# EAGLE board AiOT_Firefighter (EAGLE 9.7.0)

Size 233.03 x 199.93 mm. Coordinates in mm from the lower left corner, seen from the top.
Outline: 0,0 233.03,0 233.03,199.93 0,199.93 0,0
Copper layers (1*16): Top 0.035mm / dielectric 1.5mm / Bottom 0.035mm
Design rules "default": minimum track width 6mil, minimum drill 0.35mm, track to track 6mil, track to pad 6mil, pad to pad 6mil, via to via 6mil, smd to smd 6mil, copper to edge 40mil, drill to drill 6mil, minimum pad ring 10mil, minimum via ring 8mil, stop-mask expansion 4mil, vias tented up to drill 0mil, thermal gap 10mil

## Footprints (pad centres in the part's own frame; a part is rotated, then mirrored left to right if it is on the bottom)
BATTERY-GENERIC = drill 1.118 pad 3.15 octagon: + 2.54,0; - -2.54,0
LEDRD254W60D565H860B = drill 0.981 pad 1.581: 1 -1.27,0; 2 1.27,0
LEDRD254W60D565H860B_B = drill 0.981 pad 1.581: 1 -1.27,0; 2 1.27,0
1X06 = drill 1.016 long: 1 -6.35,0; 2 -3.81,0; 3 -1.27,0; 4 1.27,0; 5 3.81,0; 6 6.35,0
PIEZO = drill 1 pad 1.6: 1 -3.5,0; 2 3.5,0
RESAD1016W63L850D250B = drill 0.83 pad 1.43: 1 -5.08,0; 2 5.08,0
ARDUINO-UNO-R3-SHIELD = drill 1.016 pad 1.88: 3.3V 24.13,-2.54; 5V 24.13,0; A0 24.13,12.7; A1 24.13,15.24; A2 24.13,17.78; A3 24.13,20.32; A4 24.13,22.86; A5 24.13,25.4; AREF -24.13,-13.97; D2 -24.13,20.32; D3 -24.13,17.78; D4 -24.13,15.24; D5 -24.13,12.7; D6 -24.13,10.16; D7 -24.13,7.62; D8 -24.13,3.81; D9 -24.13,1.27; D10 -24.13,-1.27; D11 -24.13,-3.81; D12 -24.13,-6.35; D13 -24.13,-8.89; GND@0 24.13,2.54; GND@1 24.13,5.08; GND@2 -24.13,-11.43; IOREF 24.13,-7.62; NC 24.13,-10.16; RES 24.13,-5.08; RX -24.13,25.4; SCL -24.13,-19.05; SDA -24.13,-16.51; TX -24.13,22.86; VIN 24.13,7.62
TSOP48 = drill 0.8: 1 -2.54,0; 2 0,0; 3 2.54,0
LCD-I2C = drill 1.016 long: 1 -19.05,-5.08; 2 -19.05,-7.62; 3 -19.05,-10.16; 4 -19.05,-12.7
DIP762W53P254L1969H508Q16B = drill 0.743 pad 1.343: 1 -3.81,8.89; 2 -3.81,6.35; 3 -3.81,3.81; 4 -3.81,1.27; 5 -3.81,-1.27; 6 -3.81,-3.81; 7 -3.81,-6.35; 8 -3.81,-8.89; 9 3.81,-8.89; 10 3.81,-6.35; 11 3.81,-3.81; 12 3.81,-1.27; 13 3.81,1.27; 14 3.81,3.81; 15 3.81,6.35; 16 3.81,8.89
TO220V = drill 1.016 long: 1 -2.54,-2.54; 2 0,-2.54; 3 2.54,-2.54
TO92 = drill 0.813 octagon: 1 -1.27,0; 2 0,1.905; 3 1.27,0

## Placement (x,y rotation side)
BAT1  9V  [BATTERY-GENERIC]  8.26,74.58 180 top
DHIGH  RED  [LEDRD254W60D565H860B]  164.39,61.31 180 top
DLOW  BLUE  [LEDRD254W60D565H860B_B]  164.19,70.5 180 top
MHARWAREHACKING  PINHD-1X06_1X06M  [1X06]  135.36,11.09 180 top
PIEZOQUICKLY_A  PIEZO  [PIEZO]  185.2,100.86 270 top
R1  220k  [RESAD1016W63L850D250B]  49.76,63.35 90 top
R2  220k  [RESAD1016W63L850D250B]  49.76,68.43 90 top
RHIGH_FREQUENCY  1000k  [RESAD1016W63L850D250B]  139.84,131.7 90 top
RPULL-UP  10000k  [RESAD1016W63L850D250B]  150,131.7 90 top
RPULL-UP1  10000k  [RESAD1016W63L850D250B]  152.54,131.7 90 top
U1  ARDUINO-UNO-R3-SHIELD  [ARDUINO-UNO-R3-SHIELD]  131.97,102.49 270 top
U2  IR-RECEIVERTSOP48  [TSOP48]  226.67,118.73 270 top
U3  LCD-16X2-I2CSUNFOUNDER-IIC  [LCD-I2C]  114.04,187.61 0 top
U4  IR-RECEIVERTSOP48  [TSOP48]  226.68,102.97 270 top
U5  IR-RECEIVERTSOP48  [TSOP48]  225.99,85.3 270 top
U6  IR-RECEIVERTSOP48  [TSOP48]  147.44,193.28 0 top
U7  IR-RECEIVERTSOP48  [TSOP48]  128.32,193.37 0 top
U8  IR-RECEIVERTSOP48  [TSOP48]  107.74,193.58 0 top
U9  L293E  [DIP762W53P254L1969H508Q16B]  104.44,7.66 90 top
U10  LM7805_TO220V  [TO220V]  8.6,86.43 0 top
U13  TMP36GT9Z_TO92  [TO92]  112.33,63.99 0 top
U14  TMP36GT9Z_TO92  [TO92]  101.85,64.14 0 top
UTEMPERATURE_SENSOR  TMP36GT9Z_TO92  [TO92]  122.74,64 0 top

## Library data of the parts
BAT1 MHARWAREHACKING PIEZOQUICKLY_A R1 R2 RHIGH_FREQUENCY RPULL-UP RPULL-UP1 U1-U10 U13 U14 UTEMPERATURE_SENSOR = Tinkercad
DHIGH = Tinkercad; CATEGORY: Opto-Electronic; SUB-CATEGORY: LED; VALUE: LED_RED
DLOW = Tinkercad; CATEGORY: Opto-Electronic; SUB-CATEGORY: LED; VALUE: LED_BLUE

## Nets
BAT1+: BAT1.+ BAT1.- U9.8 U10.1 U10.2
DHIGH_C: DHIGH.2 R2.1
DLOW_C: DLOW.2 R1.1
MHARWAREHACKING_2: MHARWAREHACKING.2 RPULL-UP.2
MHARWAREHACKING_3: MHARWAREHACKING.3 U3.2
MHARWAREHACKING_4: MHARWAREHACKING.4 RPULL-UP1.2
PIEZOQUICKLY_A_1: PIEZOQUICKLY_A.1 RHIGH_FREQUENCY.2
U1_5V: U1.5V U14.3
U1_A0: U1.A0 U14.2
U1_A4: U1.A4 U3.3
U1_A5: U1.A5 U3.4
U1_D2: RPULL-UP1.1 U1.D2
U1_D3: RPULL-UP.1 U1.D3
U1_D5: DLOW.1 U1.D5
U1_D6: DHIGH.1 U1.D6
U1_D7: RHIGH_FREQUENCY.1 U1.D7
U1_GND: R1.2 R2.2 U1.GND@0 U1.GND@1 U1.GND@2
U3_GND: MHARWAREHACKING.5 MHARWAREHACKING.6 U3.1
U9_1A: MHARWAREHACKING.1 U9.2 U9.6
U9_GND3: U9.4 U9.5 U9.12 U9.13
U9_VCC1: U9.1 U9.16

## Tracks (layer width: path | path; a pad name or v marks a point on that pad's centre or on a via)
BAT1+  (4 unrouted)
DHIGH_C  (1 unrouted)
DLOW_C  (1 unrouted)
MHARWAREHACKING_2  (1 unrouted)
MHARWAREHACKING_3  (1 unrouted)
MHARWAREHACKING_4  (1 unrouted)
PIEZOQUICKLY_A_1  (1 unrouted)
U1_5V  (1 unrouted)
U1_A0  (1 unrouted)
U1_A4  (1 unrouted)
U1_A5  (1 unrouted)
U1_D2  (1 unrouted)
U1_D3  (1 unrouted)
U1_D5  (1 unrouted)
U1_D6  (1 unrouted)
U1_D7  (1 unrouted)
U1_GND  (4 unrouted)
U3_GND  (2 unrouted)
U9_1A  (2 unrouted)
U9_GND3  (3 unrouted)
U9_VCC1  (1 unrouted)